# Allegro board PROIECT.brd
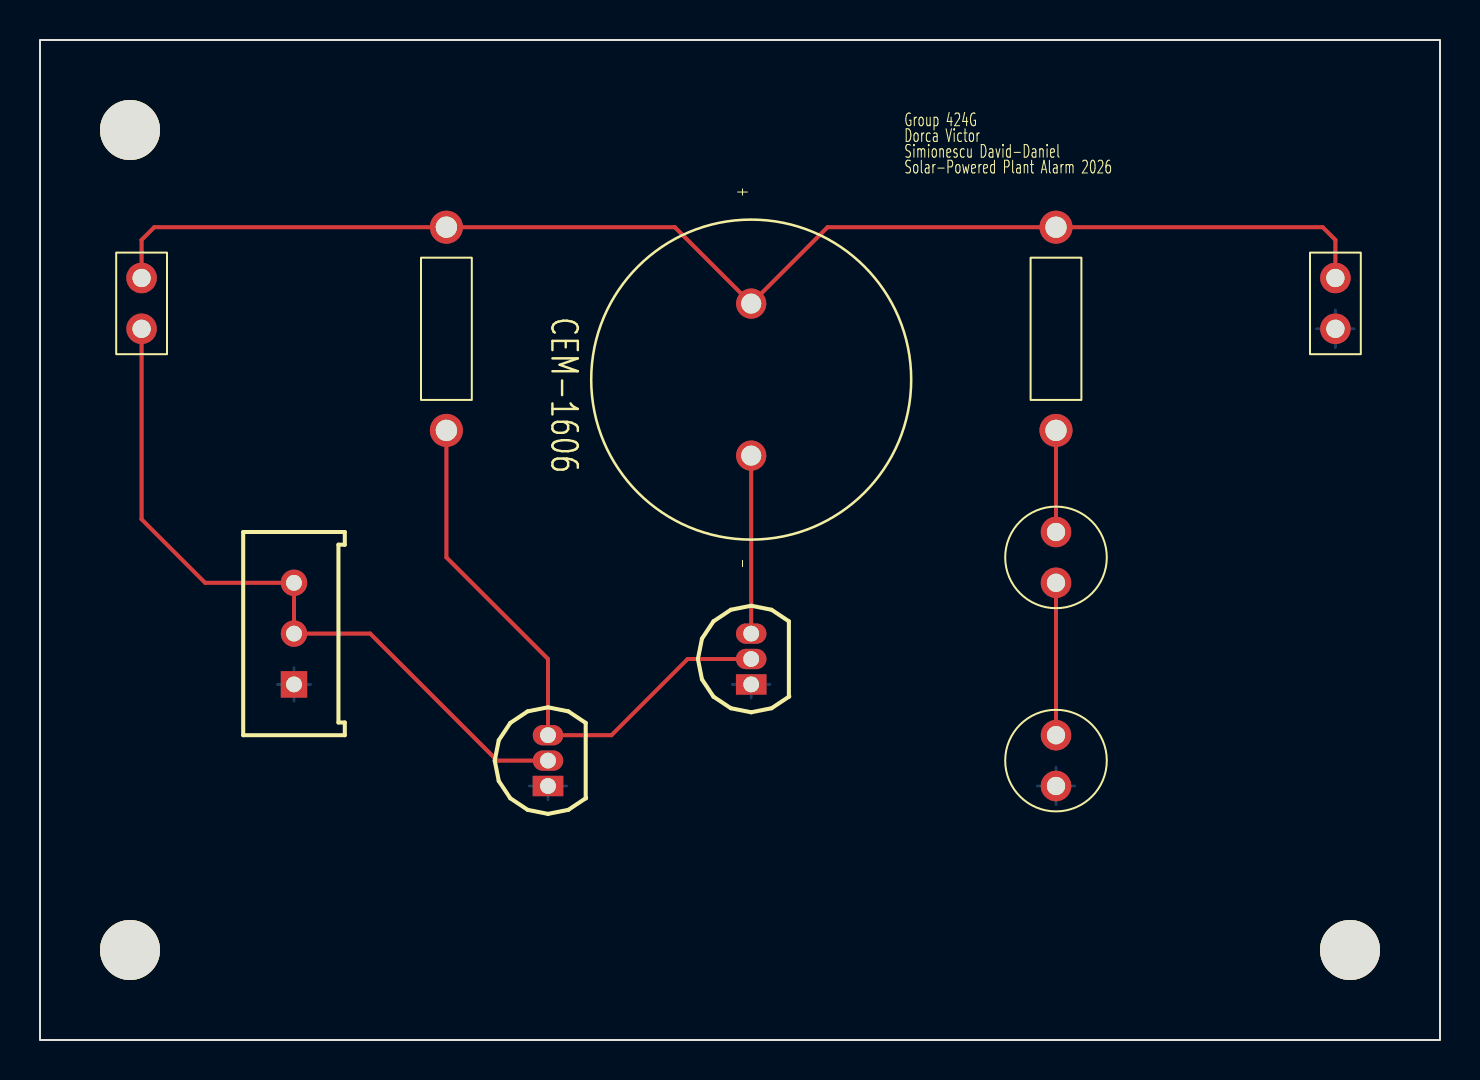
[diagram p0: board, top side]
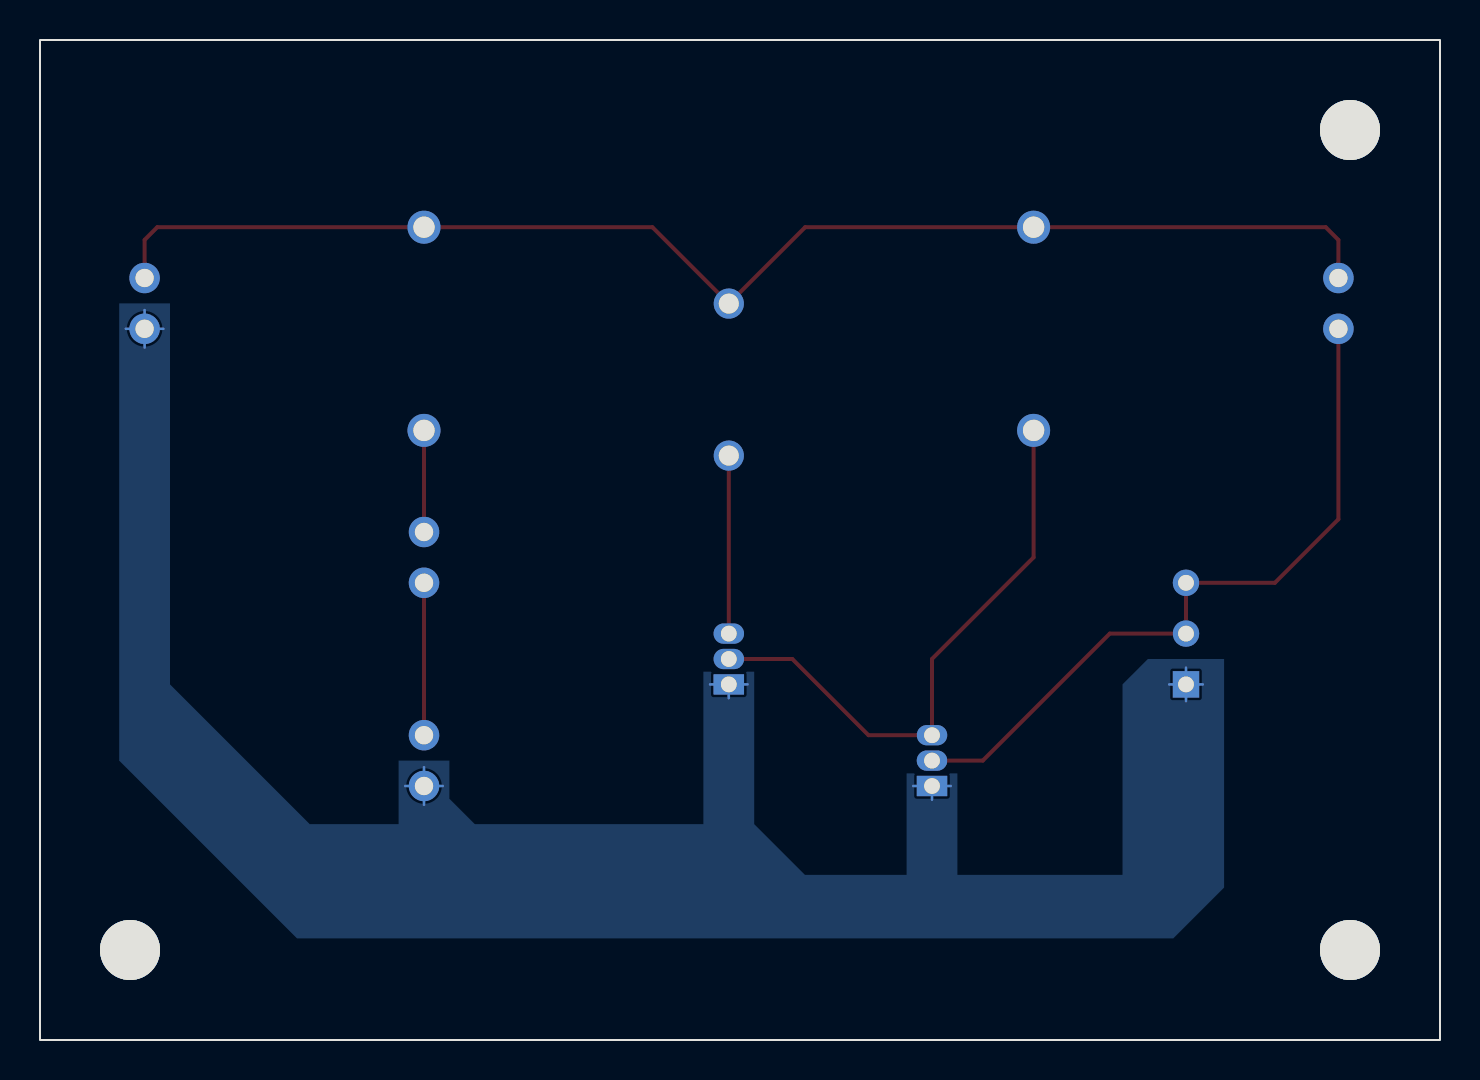
[diagram p1: board, bottom side, seen from below]

Outline 70 x 50 mm; copper layers: TOP, BOTTOM. Coordinates in mm from the lower left corner of the outline.
Outline path: rectangle 0,0 70,50

## Design rules (mm)
constraint set DEFAULT: min track width 0.127

## Placement (name value [footprint] x y rotation side)
D1  LED  [CAP196]  50.8 25.4 180 top
D2  LED  [CAP196]  50.8 15.24 180 top
J1  Solar cell  [JUMPER2]  64.77 38.1 270 top
J2  Probes  [JUMPER2]  5.08 35.56 90 top
LS1  CEM-1606  [CUI_CEM-1606]  35.56 33.02 270 top
NOREF  -  []  0 0 0 top
NOREF#2  -  [unnamed#2]  4.5 4.5 0 top
NOREF#3  -  [unnamed#2]  65.5 4.5 0 top
NOREF#4  -  [unnamed#2]  4.5 45.5 0 top
NOREF#5  -  []  70 0 90 top
Q1  2N3904  [TO92]  25.4 12.7 90 top
Q2  2N3904  [TO92]  35.56 17.78 90 top
R1  10k  [RES400]  20.32 40.64 180 top
R2  100  [RES400]  50.8 40.64 180 top
VR1  50k  [VRES58]  12.7 17.78 90 top

## Library data of the parts
D1 D2 = LED: Tolerance: ***; User Part Number: ***
J1 J2 = CON2: User Part Number: ***
LS1 = CEM-1606
Q1 Q2 = 2N3904
R1 R2 = R: Tolerance: ***; User Part Number: ***
VR1 = POT

## Footprints (pads in the part's own frame, mm; a bottom-side part is the same pattern mirrored in y, then rotated)
CAP196
  round 1.524 hole 0.914: 1(0,0) 2(0,2.54)
CUI_CEM-1606
  round 1.508 hole 1: N(3.8,0) P(-3.8,0)
JUMPER2
  round 1.524 hole 0.914: 1(0,0) 2(2.54,0)
RES400
  round 1.651 hole 1.067: 1(0,0) 2(0,10.16)
TO92
  rect 1.016x1.524 hole 0.787: 1(0,0)
  oval 1.016x1.524 hole 0.787: 2(1.27,0) 3(2.54,0)
unnamed#2
  round 3 hole 3.2 unplated: (0,0)
VRES58
  rect 1.321x1.321 hole 0.787: 1(0,0)
  round 1.321 hole 0.787: 2(2.54,0) 3(5.08,0)

## Nets
GND: D2.2(CATHODE) J1.2 Q1.1(EMITTER) Q2.1(EMITTER) VR1.1
N00346: D1.1 R2.2
N00350: D1.2(CATHODE) D2.1
N00431: Q1.3 Q2.2 R1.2
N00435: J1.1 J2.2 LS1.P R1.1 R2.1
N00515: LS1.N Q2.3
N01959: J2.1 Q1.2 VR1.2(WIPER) VR1.3

## Routing (per net, layer and track width the routed paths; a pad name or vN(x,y) marks a point on that pad's centre or on a via; arc(x,y) is an arc through that point)
GND: length 16
  BOTTOM w0.127: 63.83,35.56 J1.2 ; J1.2 64.77,34.62 ; J1.2 64.77,36.5 ; J1.2 65.71,35.56 ; 12.7,16.94 VR1.1 ; VR1.1 11.86,17.78 ; VR1.1 12.7,18.62 ; VR1.1 13.54,17.78 ; 34.62,17.78 Q2.1 ; Q2.1 35.56,17.09 ; Q2.1 36.5,17.78 ; 50.8,11.76 D2.2 ; D2.2 49.86,12.7 ; D2.2 50.8,13.64 ; D2.2 51.74,12.7 ; Q1.1 26.34,12.7 ; Q1.1 24.46,12.7 ; Q1.1 25.4,12.01
N00346: length 5.1
  TOP w0.2: R2.2 D1.1
N00350: length 7.6
  TOP w0.2: D1.2 D2.1
N00431: length 29.1
  TOP w0.2: R1.2 20.32,24.13 25.4,19.05 Q1.3 28.57,15.24 32.38,19.05 Q2.2
N00435: length 67.2
  TOP w0.2: J2.2 5.08,40.01 5.71,40.64 R1.1 31.74,40.64 LS1.P 39.38,40.64 R2.1 64.14,40.64 64.77,40.01 J1.1
N00515: length 8.9
  TOP w0.2: LS1.N Q2.3
N01959: length 36.3
  TOP w0.2: J2.1 5.08,26.04 8.26,22.86 VR1.3 VR1.2 16.51,20.32 22.86,13.97 Q1.2

## Copper pours and planes (outline as drawn; the poured copper is in the pictures)
GND on BOTTOM: 10.79,19.05 14.61,19.05 15.88,17.78 15.88,8.26 24.13,8.26 24.13,13.34 26.67,13.34 26.67,8.26 31.75,8.26 34.29,10.79 34.29,18.41 36.83,18.41 36.83,10.79 48.26,10.79 49.53,12.06 49.53,13.97 52.07,13.97 52.07,10.79 56.52,10.79 63.5,17.78 63.5,36.83 66.04,36.83 66.04,13.97 57.15,5.08 13.34,5.08 10.79,7.62

## Text on the board
Ref Des/Silkscreen Top: Group 424G | Dorca Victor | Simionescu David-Daniel | Solar-Powered Plant Alarm 2026
XSECTION_CHART: *  SURFACE - AIR 0 MM(+0/-0) | L1 TOP CONDUCTOR - COPPER 0.03048 MM(+0/-0) | *  DIELECTRIC - FR-4 0.2032 MM(+0/-0) | L2 BOTTOM CONDUCTOR - COPPER 0.03048 MM(+0/-0) | DESIGN CROSS SECTION CHART | ___________________________ | TOTAL THICKNESS 0.26416 MM | 1-2
DIMENSION: FIGURE | FINISHED_SIZE | 0.7874 | 0.9144 | 1.0 | 1.0668 | 3.2 | DRILL CHART: TOP to BOTTOM | ALL UNITS ARE IN MILLIMETERS | PLATED | NON-PLATED | QTY | 9 | 8 | 2 | 4 | 3
